# Altium PCB PCB2.PcbDoc (part 1 of 2)
Units mm, origin at the board's own origin, x right, y up, seen from the top; angles counter-clockwise.
Board outline 50.17 x 32.13 mm, 2 copper layers (Top Layer, Bottom Layer); 40 components, 154 nets, 422 pads, 221 vias.
Unrouted connection lines stored in the file: 21.
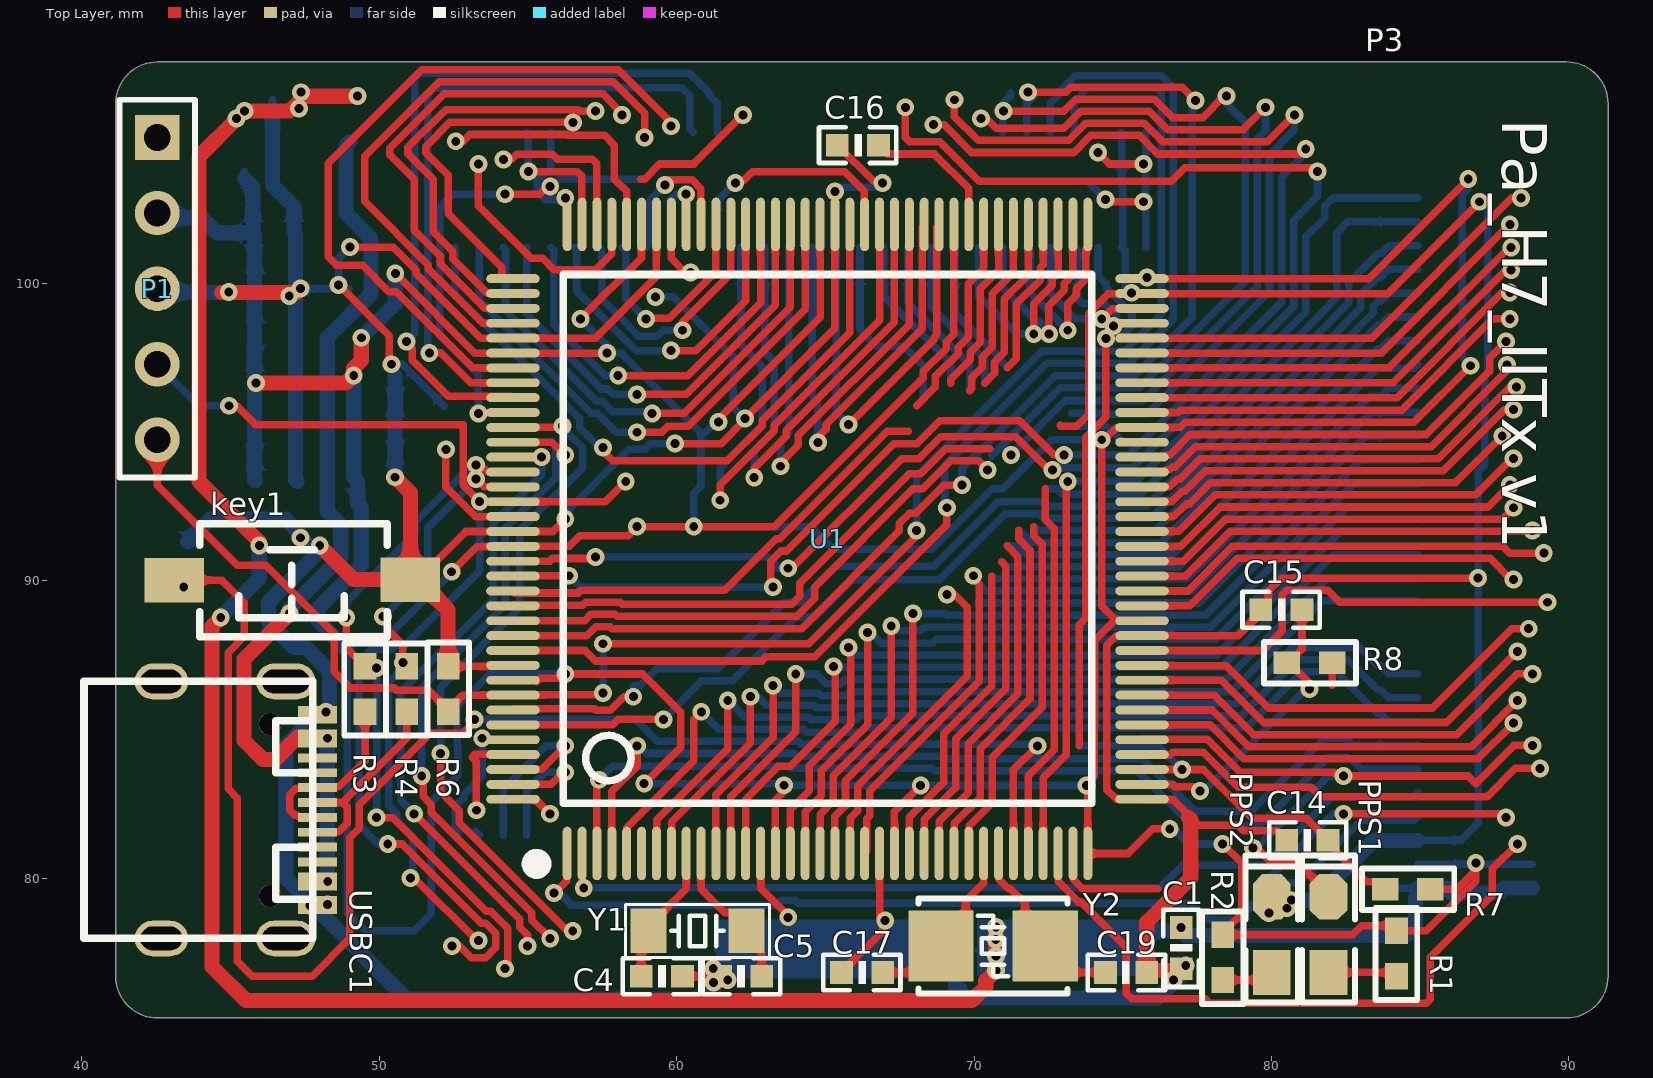
[diagram p0: Top Layer view]
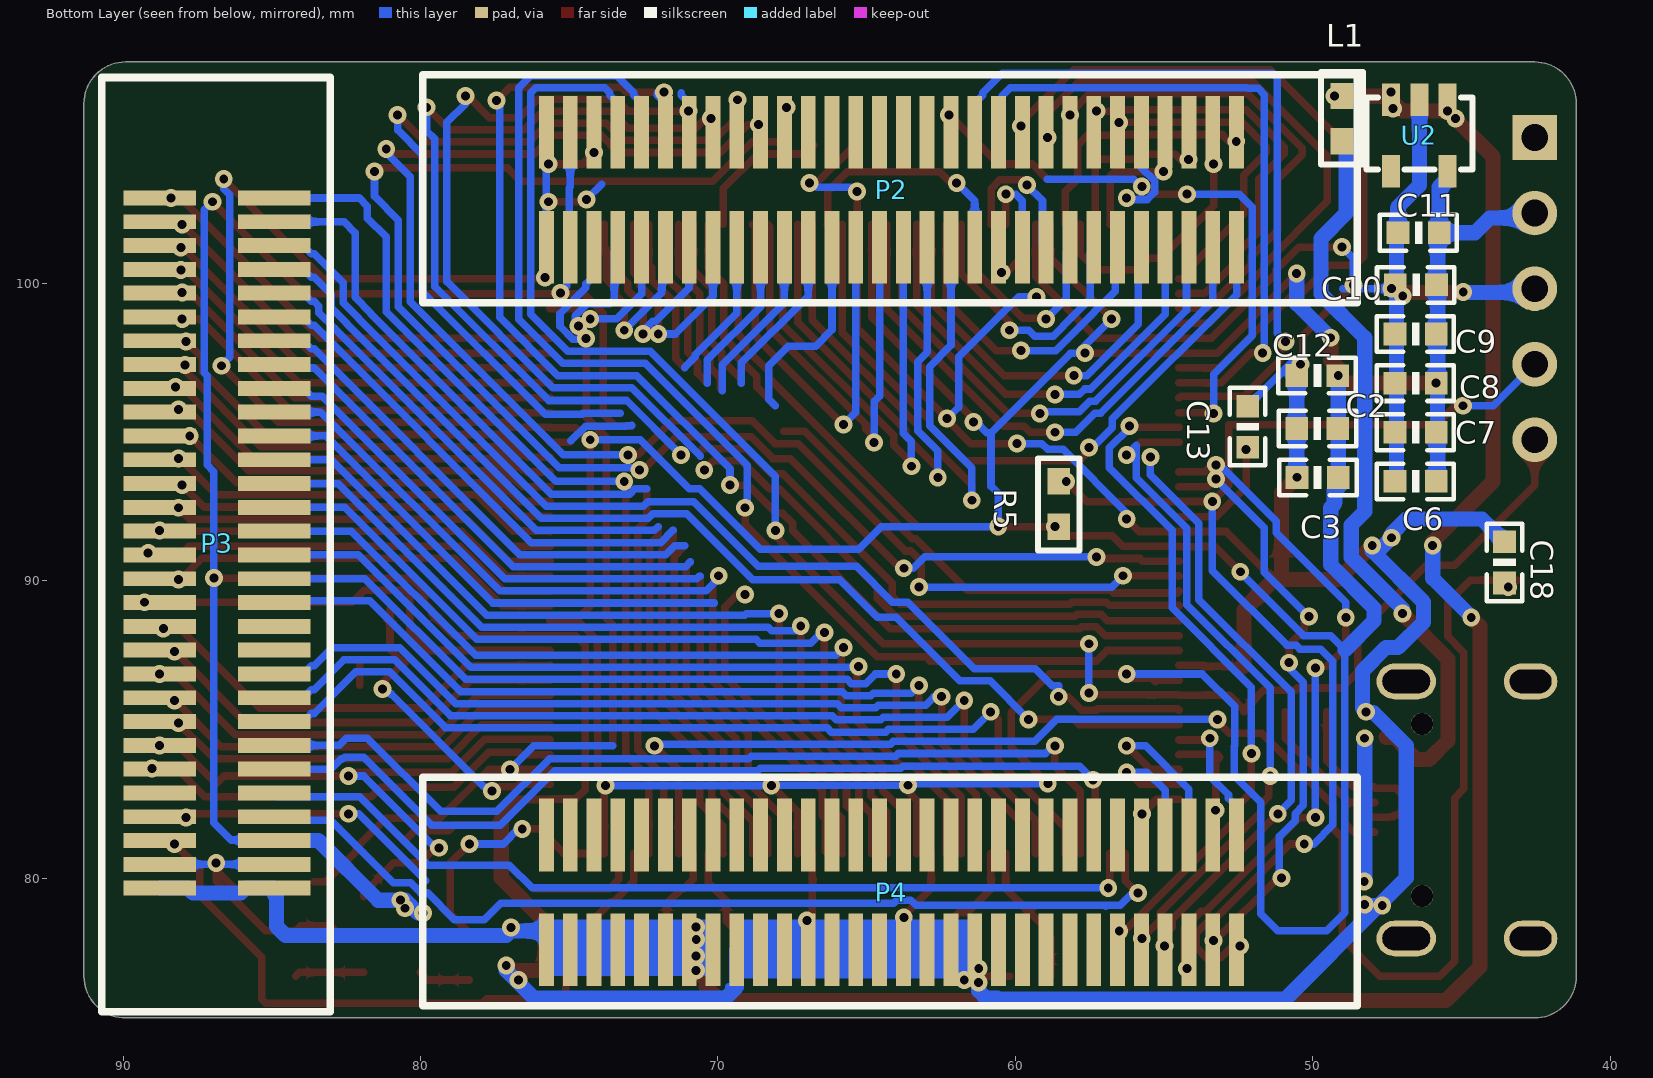
[diagram p1: Bottom Layer view, seen from below]

## Layer stack, top to bottom
Top Solder: solder mask 0.0102, Solder Resist, Dk 3.5
Top Layer: signal copper 0.0356
Dielectric 1: dielectric 0.32, FR-4, Dk 4.8
Bottom Layer: signal copper 0.0356
Bottom Solder: solder mask 0.0102, Solder Resist, Dk 3.5

## Board outline
42.545,75.311 cw(c42.545,76.708) 41.148,76.708 41.148,106.045 cw(c42.545,106.045) 42.545,107.442 43.561,107.442 42.926,107.442 89.916,107.442 cw(c89.916,106.045) 91.313,106.045 91.313,76.708 cw(c89.916,76.708) 89.916,75.311

## Design rules (kind name [scope] priority, off if disabled: settings)
Clearance [All] p1: gap=0.152 ignorepadtopadclearanceinfootprint=FALSE
ComponentClearance [All] p1 off: gap=0.254 collisioncheckmode=3 verticalgap=0.254 showdistances=FALSE
PolygonConnect [All] p1: connectstyle=Relief reliefconductorwidth=0.254 reliefentries=4 polygonreliefangle="90 Angle" airgapwidth=0.254
RoutingVias [All] p1: holewidth=0.711 width=1.27 viastyle="Through Hole" minholewidth=0.711 minwidth=1.27 maxholewidth=0.711 maxwidth=1.27
SolderMaskExpansion [All] p1: expansion=0.102 istentingtop=FALSE
Width [All] p1: maxlimit=1.524 minlimit=0.254 preferedwidth=0.254 minimp=50.000000 maximp=50.000000 favimp=50.000000
29 further rules are at their usual default settings.

## Components (designator, comment, footprint, x,y, rotation, side; value= is the part's Value field where it differs from the comment)
C1 "Cap Semi" 0603-C 76.964,78.346 r270 top value=105
C2 "Cap Semi" 0603-C 50.546,95.123 r180 bottom value=104
C3 "Cap Semi" 0603-C 50.533,93.474 r180 bottom value=105
C4 "" 0603-c 60.198,76.708 r180 top value=10P
C5 "" 0603-c 61.481,76.71 r0 top value=10P
C6 "" 0603-c 45.86,93.343 r0 bottom value=104
C7 "" 0603-c 45.86,94.994 r0 bottom value=104
C8 "" 0603-c 45.86,96.645 r0 bottom value=104
C9 "" 0603-c 45.86,98.296 r0 bottom value=104
C10 "" 0603-c 45.847,99.949 r0 bottom value=104
C11 "" 0603-c 45.758,101.7 r0 bottom value=106
C12 "" 0603-c 49.162,96.899 r0 bottom value=104
C13 "" 0603-c 52.197,94.488 r90 bottom value=2.2UF
C14 "" 0603-c 80.518,81.28 r0 top value=104
C15 "" 0603-c 81.026,89.027 r180 top value=104
C16 "" 0603-c 66.789,104.646 r180 top value=2.2UF
C17 "" 0603-c 66.929,76.835 r180 top value=20P
C18 "" 0603-c 43.561,91.313 r270 bottom value=104
C19 "" 0603-c 74.422,76.835 r0 top value=20P
key1 "KEY" "TSW SMD-3*6*2.5" 47.058,90.023 r180 top
L1 "L" 0603-r 49.022,106.299 r270 bottom
P1 "Header 5" HDR1X5 42.545,104.902 r270 top
P2 "Header 30X2" BTB60 64.174,103.124 r90 top locked
P3 "Header 30X2" BTB60 86.818,91.264 r0 top locked
P4 "Header 30X2" BTB60 64.174,79.502 r90 top locked
PPS1 "LED" "LED 0805G" 81.915,78.105 r90 top
PPS2 "LED" "LED 0805G" 80.01,78.105 r90 top
R1 "1k" 0603-R 84.201,76.708 r90 top
R2 "1k" 0603-r 78.359,76.581 r90 top
R3 "0Ω" 0603-r 49.53,85.598 r90 top
R4 "0Ω" 0603-r 50.927,85.598 r90 top
R5 "10K" 0603-r 58.547,91.821 r90 bottom
R6 "10K" 0603-r 52.324,87.122 r270 top
R7 "0" 0603-r 85.344,79.629 r180 top
R8 "0" 0603-r 82.042,87.249 r180 top
U1 "STM32H743IIT6" "LQFP144 20X20_N" 65.075,91.408 r0 top locked
U2 "RT9013" SOT23-5 46.421,104.972 r0 bottom
USBC1 "TYPE-C 3.1" TYPE-C-USB-17 45.307,82.298 r270 top
Y1 "32.768KHz" "OSC 3215-2P" 60.705,78.232 r180 top
Y2 "25M" "OSC 5032-2P" 70.64,77.724 r180 top

## Footprints (in the part's own frame and the unit in brackets; to place one, negate y for a bottom-side part, rotate by r counter-clockwise, add the part's x,y. Pads: shape width x height; smd on the part's side, far side on the other; paste and mask are expansions set on the pad)
0603-C [mil]
  rect 30x30 smd: 1(0,0) 2(54.5,-0.06)
  silkscreen extent -24,-24 79,24
0603-c [mil]
  rect 30x30 smd: 1(0,0) 2(54.5,-0.06)
  silkscreen extent -24,-24 79,24
0603-r [mil]
  rect 35x30 smd: 1(0,0) 2(60,0)
  silkscreen extent -31,-28 91,28, body extent -22,-19 82,19, height 39
0603-R [mil]
  rect 35x30 smd: 1(0,0) 2(60,0)
  silkscreen extent -31,-28 91,28, body extent -22,-19 82,19, height 39
BTB60 [mm]
  rect 2.44x0.5 smd far side: 1(-1.905,-11.594) 2(1.955,-11.594) 3(-1.905,-10.794) 4(1.955,-10.794) 5(-1.905,-9.994) 6(1.955,-9.994) 7(-1.905,-9.194) 8(1.955,-9.194) 9(-1.905,-8.394) 10(1.955,-8.394) 11(-1.905,-7.594) 12(1.955,-7.594) 13(-1.905,-6.794) 14(1.955,-6.794) 15(-1.905,-5.994) 16(1.955,-5.994) 17(-1.905,-5.194) 18(1.955,-5.194) 19(-1.905,-4.394) 20(1.955,-4.394) 21(-1.905,-3.594) 22(1.955,-3.594) 23(-1.905,-2.794) 24(1.955,-2.794) 25(-1.905,-1.994) 26(1.955,-1.994) 27(-1.905,-1.194) 28(1.955,-1.194) 29(-1.905,-0.394) 30(1.955,-0.394) 31(-1.905,0.406) 32(1.955,0.406) 33(-1.905,1.206) 34(1.955,1.206) 35(-1.905,2.006) 36(1.955,2.006) 37(-1.905,2.806) 38(1.955,2.806) 39(-1.905,3.606) 40(1.955,3.606) 41(-1.905,4.406) 42(1.955,4.406) 43(-1.905,5.206) 44(1.955,5.206) 45(-1.905,6.006) 46(1.955,6.006) 47(-1.905,6.806) 48(1.955,6.806) 49(-1.905,7.606) 50(1.955,7.606) 51(-1.905,8.406) 52(1.955,8.406) 53(-1.905,9.206) 54(1.955,9.206) 55(-1.905,10.006) 56(1.955,10.006) 57(-1.905,10.806) 58(1.955,10.806) 59(-1.905,11.606) 60(1.955,11.606)
HDR1X5 [mm] "Connector; Header; 5 Position"
  rect 1.5x1.5 hole 0.9: 1(0,0)
  round 1.5 hole 0.9: 2(2.54,0) 3(5.08,0) 4(7.62,0) 5(10.16,0)
  silkscreen extent -1.27,-1.27 11.43,1.27
"LED 0805G" [mil] "绿色0805LED"
  rect 60x50 smd: 1(-50,0)
  oct 60x50 smd: 2(50,0)
  silkscreen extent -90,-35 105,35, body extent -39,-25 39,25, height 32
"LQFP144 20X20_N" [mm] "144脚，体宽20x20mm，脚距0.5mm"
  oval 0.3x1.8 smd: 1(-8.75,-10.573) 2(-8.25,-10.573) 3(-7.75,-10.573) 4(-7.25,-10.573) 5(-6.75,-10.573) 6(-6.25,-10.573) 7(-5.75,-10.573) 8(-5.25,-10.573) 9(-4.75,-10.573) 10(-4.25,-10.573) 11(-3.75,-10.573) 12(-3.25,-10.573) 13(-2.75,-10.573) 14(-2.25,-10.573) 15(-1.75,-10.573) 16(-1.25,-10.573) 17(-0.75,-10.573) 18(-0.25,-10.573) 19(0.25,-10.573) 20(0.75,-10.573) 21(1.25,-10.573) 22(1.75,-10.573) 23(2.25,-10.573) 24(2.75,-10.573) 25(3.25,-10.573) 26(3.75,-10.573) 27(4.25,-10.573) 28(4.75,-10.573) 29(5.25,-10.573) 30(5.75,-10.573) 31(6.25,-10.573) 32(6.75,-10.573) 33(7.25,-10.573) 34(7.75,-10.573) 35(8.25,-10.573) 36(8.75,-10.573) 73(8.75,10.573) 74(8.25,10.573) 75(7.75,10.573) 76(7.25,10.573) 77(6.75,10.573) 78(6.25,10.573) 79(5.75,10.573) 80(5.25,10.573) 81(4.75,10.573) 82(4.25,10.573) 83(3.75,10.573) 84(3.25,10.573) 85(2.75,10.573) 86(2.25,10.573) 87(1.75,10.573) 88(1.25,10.573) 89(0.75,10.573) 90(0.25,10.573) 91(-0.25,10.573) 92(-0.75,10.573) 93(-1.25,10.573) 94(-1.75,10.573) 95(-2.25,10.573) 96(-2.75,10.573) 97(-3.25,10.573) 98(-3.75,10.573) 99(-4.25,10.573) 100(-4.75,10.573) 101(-5.25,10.573) 102(-5.75,10.573) 103(-6.25,10.573) 104(-6.75,10.573) 105(-7.25,10.573) 106(-7.75,10.573) 107(-8.25,10.573) 108(-8.75,10.573)
  oval 1.8x0.3 smd: 37(10.573,-8.75) 38(10.573,-8.25) 39(10.573,-7.75) 40(10.573,-7.25) 41(10.573,-6.75) 42(10.573,-6.25) 43(10.573,-5.75) 44(10.573,-5.25) 45(10.573,-4.75) 46(10.573,-4.25) 47(10.573,-3.75) 48(10.573,-3.25) 49(10.573,-2.75) 50(10.573,-2.25) 51(10.573,-1.75) 52(10.573,-1.25) 53(10.573,-0.75) 54(10.573,-0.25) 55(10.573,0.25) 56(10.573,0.75) 57(10.573,1.25) 58(10.573,1.75) 59(10.573,2.25) 60(10.573,2.75) 61(10.573,3.25) 62(10.573,3.75) 63(10.573,4.25) 64(10.573,4.75) 65(10.573,5.25) 66(10.573,5.75) 67(10.573,6.25) 68(10.573,6.75) 69(10.573,7.25) 70(10.573,7.75) 71(10.573,8.25) 72(10.573,8.75) 109(-10.573,8.75) 110(-10.573,8.25) 111(-10.573,7.75) 112(-10.573,7.25) 113(-10.573,6.75) 114(-10.573,6.25) 115(-10.573,5.75) 116(-10.573,5.25) 117(-10.573,4.75) 118(-10.573,4.25) 119(-10.573,3.75) 120(-10.573,3.25) 121(-10.573,2.75) 122(-10.573,2.25) 123(-10.573,1.75) 124(-10.573,1.25) 125(-10.573,0.75) 126(-10.573,0.25) 127(-10.573,-0.25) 128(-10.573,-0.75) 129(-10.573,-1.25) 130(-10.573,-1.75) 131(-10.573,-2.25) 132(-10.573,-2.75) 133(-10.573,-3.25) 134(-10.573,-3.75) 135(-10.573,-4.25) 136(-10.573,-4.75) 137(-10.573,-5.25) 138(-10.573,-5.75) 139(-10.573,-6.25) 140(-10.573,-6.75) 141(-10.573,-7.25) 142(-10.573,-7.75) 143(-10.573,-8.25) 144(-10.573,-8.75)
  silkscreen extent -10.03,-11.17 8.89,8.89, body extent -11,-11 11,11, height 1.45
"OSC 3215-2P" [mm] "3.2*1.5*0.6mm(长宽高)"
  rect 1.2x1.5 smd: 1(-1.65,0) 2(1.65,0)
  silkscreen extent -2.41,-0.89 2.41,0.89, body extent -1.6,-0.75 1.6,0.75, height 0.61
"OSC 5032-2P" [mm] "5mm*3.2mm*0.8mm(长*宽*高)"
  rect 2.2x2.4 smd: 1(-1.75,0) 2(1.75,0)
  silkscreen extent -2.5,-1.6 2.5,1.6, body extent -2.5,-1.6 2.5,1.6, height 0.86
SOT23-5 [mm]
  rect 0.6x1.1 smd: 1(-0.95,-1.2) 2(0,-1.2) 3(0.95,-1.2) 4(0.95,1.2) 5(-0.95,1.2)
  silkscreen extent -1.78,-1.27 1.78,1.14, body extent -1.55,-0.9 1.55,0.9, height 1.45
"TSW SMD-3*6*2.5" [mm] "3*6*2.5mm"
  rect 2x1.5 smd: 1(-3.996,-0.02) 2(3.937,0)
  silkscreen extent -3.21,-1.9 3.09,1.9, body extent -4,-1.88 4,1.62, height 2.59
TYPE-C-USB-17 [mm]
  oval 1.2x2 hole 0.8 slot 1.6 at 90 deg: 0(-4.32,1.556) 0(4.32,1.556)
  oval 1.2x1.8 hole 0.8 slot 1.4 at 90 deg: 0(-4.32,-2.624) 0(4.32,-2.624)
  rect 0.3x1.3 smd: A1(-3.35,2.623) A4(-2.55,2.623) A5(-1.25,2.623) A6(-0.25,2.623) A7(0.25,2.623) A8(-1.75,2.624) A9(2.55,2.623) A12(3.35,2.623) B1(3.05,2.623) B4(2.25,2.623) B5(1.75,2.623) B6(0.75,2.623) B7(-0.75,2.623) B8(1.25,2.624) B9(-2.25,2.623) B12(-3.05,2.623)
  round 0.75 hole 0.75 unplated: ""(-2.89,1.026) ""(2.89,1.026)
  silkscreen extent -4.32,-5.23 4.32,2.47

## Part data
C1 C2 C3: "Capacitor (Semiconductor SIM Model)", LatestRevisionDate=29-May-2009, LatestRevisionNote="IPC-7351 Footprint Added.", PackageDescription="Chip Capacitor", PackageReference=C1206, Published=8-Jun-2000, Publisher="Altium Limited"
C4 C5 C6 C7 C8 C9 C10 C11 C13 C14 C15 C16 C17 C18 C19: library part Cap_1_1, "Capacitor", LatestRevisionDate=17-Jul-2002, LatestRevisionNote="Re-released for DXP Platform.", PackageDescription="Radial Cap, Thru-Hole; 2 Leads; 0.3 in Pin Spacing", PackageReference=RAD-0.3, Published=8-Jun-2000, Publisher="Altium Limited"
C12: library part Cap_1_1, "104", LatestRevisionDate=17-Jul-2002, LatestRevisionNote="Re-released for DXP Platform.", PackageDescription="Radial Cap, Thru-Hole; 2 Leads; 0.3 in Pin Spacing", PackageReference=RAD-0.3, Published=8-Jun-2000, Publisher="Altium Limited"
P1: "Header, 5-Pin"
P2 P3 P4: "Header, 30-Pin, Dual row", LatestRevisionDate=17-Jul-2002, LatestRevisionNote="Re-released for DXP Platform.", Publisher="Altium Limited"
R1 R2 R3 R4 R5 R6 R7 R8: library part RES, "Resistor", LatestRevisionDate=17-Jul-2002, LatestRevisionNote="Re-released for DXP Platform.", PackageDescription="Axial Device, Thru-Hole; 2 Leads; 0.4 in Pin Spacing", PackageReference=AXIAL-0.4, Published=8-Jun-2000, Publisher="Altium Limited"
U1: BOM_LCSC Assembly=Yes, BOM_Manufacturer=STMicroelectronics, BOM_Manufacturer Part=STM32H743IIT6, BOM_Supplier=LCSC, BOM_Supplier Part=C89597, Contributor=LCSC, SMT Type=Extend, spicePre=U, spiceSymbolName=STM32H743IIT6
Y1 Y2: library part XTAL, "Crystal Oscillator", LatestRevisionDate=17-Jul-2002, LatestRevisionNote="Re-released for DXP Platform.", Published=8-Jun-2000, Publisher="Altium Limited"

## Via types
v1: diameter 0.6, hole 0.3, Top Layer to Bottom Layer, 221 vias

## Nets (pads, with @x,y where several pads share a name; then routed paths per layer and width w, separated by ;. In a path a pad name is that pad's centre, name@x,y a point inside that pad or via, vN(x,y) a via of type N, cw(c..) or ccw(c..) an arc to the next point about the centre after c; other vN are vias at no path point)
3.3V: C2.2 C3.2 C6.1 C7.1 C8.1 C9.1 C10.1 C11.1 C12.1 P1.2 P2.1 P2.2 P2.6 P3.3 P3.4 R1.2 R2.2 R5.1 R7.1 U1.15 U1.23 U1.36 U1.49 U1.62 U1.72 U1.82 U1.91 U1.103 U1.114 U1.127 U1.136 U2.5 | length 237.9
  Top Layer w0.254: v1@50.676,100.206 53.224,97.658 U1.114@54.502,97.658 54.51,97.65 57.645,97.65 v1(57.658,97.663) ; v1(52.441,90.307) 53.284,91.149 54.493,91.149 U1.127@54.502,91.158 56.388,91.158 56.749,91.519 58.372,91.519 v1(58.674,91.821) v1(60.579,91.821) 63.289,91.821 68.297,96.829 68.297,97.042 69.063,97.807 69.063,98.021 69.325,98.284 U1.82@69.325,101.981 ; U1.136@54.502,86.658 55.264,86.658 55.308,86.614 55.423,86.729 56.122,86.729 v1(56.261,86.868) 58.858,86.868 60.142,85.584 60.142,84.413 v1(58.913,83.184) ; v1(56.769,98.806) 58.825,100.862 U1.103@58.825,101.981 ; v1(61.411,95.344) 61.411,95.447 64.825,98.861 U1.91@64.825,101.981 ; U1.15@63.325,80.835 63.325,82.629 63.609,82.913 v1(63.609,83.129) ; U1.23@67.325,80.835 67.325,82.238 v1(68.208,83.121) v1@68.244,83.121 ; v1@73.797,83.195 74.041,83.439 74.041,85.09 74.062,85.111 74.062,88.004 74.066,88.008 74.066,88.011 74.705,88.649 ; v1@73.825,83.133 U1.36@73.825,80.835 75.18,80.835 76.006,81.661 v1(76.581,81.661) ; v1(74.168,104.394) 74.549,104.013 v1(75.692,104.013) ; v1(74.295,94.742) 74.295,89.154 74.782,88.667 75.639,88.667 U1.49@75.648,88.658 ; v1(74.422,102.819) 74.498,102.743 v1(75.692,102.743) ; v1@74.469,94.836 74.782,95.149 75.639,95.149 U1.62@75.648,95.158 76.931,95.158 77.099,95.326 84.785,95.326 v1(86.69,97.231) ; U1.72@75.648,100.158 83.267,100.158 v1(86.614,103.505) ; v1(78.359,81.153) 78.994,80.518 78.994,78.803 78.359,78.168 R2.2@78.359,78.105 82.724,78.105 83.03,78.412 84.021,78.412 R1.2@84.201,78.232 85.206,78.232 86.868,79.894 v1@86.868,80.264 ; R7.1@85.344,79.629 86.233,79.629 v1@86.868,80.264 ; v1(86.868,80.518) v1@86.868,80.264
  Top Layer w0.508: v1(45.86,96.645) 48.893,96.645 v1(49.149,96.901) 49.149,97.155 49.403,97.409 v1(49.403,98.171)
  Bottom Layer w0.254: P1.2@42.164,102.235 P1.2@42.264,102.335 ; U2.5@45.471,103.522 U2.5@45.471,103.772 ; C6.1@45.847,93.356 C6.1@45.86,93.343 ; v1(52.441,90.307) 52.441,90.284 50.392,88.235 50.317,88.16 49.407,88.16 48.925,87.678 48.925,78.837 49.53,78.232 51.181,78.232 51.76,78.811 51.76,82.564 52.649,83.453 52.649,84.441 52.634,84.457 52.634,85.781 53.721,86.868 v1(56.261,86.868) ; v1(56.769,98.806) v1@57.923,97.652 ; 58.034,97.658 58.15,97.658 60.822,94.985 ; v1(58.913,83.184) 63.554,83.184 v1(63.609,83.129) 68.199,83.129 v1(68.208,83.121) v1(73.787,83.121) ; v1(61.411,95.344) 61.317,95.344 60.958,94.985 60.822,94.985 ; 73.908,103.333 v1(74.422,102.819) ; v1(74.295,94.742) 72.62,94.742 70.969,93.091 70.612,93.091 68.583,91.062 65.275,91.062 64.516,91.821 v1(60.579,91.821) 60.579,92.943 60.822,93.186 60.822,94.985 ; v1(75.692,102.743) 75.768,102.667 P2.1@75.768,101.219 ; v1@75.768,102.819 P2.2@75.768,105.079 ; v1(76.581,81.661) 76.708,81.661 77.216,81.153 v1(78.359,81.153) ; P3.3@84.913,80.47 P3.4@88.773,80.47 ; v1(86.614,103.505) 86.614,103.181 86.416,102.983 86.416,97.52 86.69,97.245 v1(86.69,97.231)
  Bottom Layer w0.508: P1.2@42.545,102.362 42.711,102.196 44.057,102.196 44.553,101.7 C11.1@45.758,101.7 ; U2.5@45.471,103.522 45.758,103.235 C11.1@45.758,101.7 ; C6.1@45.847,93.356 45.809,93.394 45.809,101.649 C11.1@45.758,101.7 ; 48.925,87.678 47.943,88.66 47.943,89.081 49.403,90.54 49.403,92.456 49.276,92.583 49.276,93.345 C3.2@49.149,93.472 v1(49.149,96.901) ; v1(49.403,98.171) 50.546,99.314 v1(50.546,100.33)
  other v1: 75.819,100.203
5V: C1.1 L1.1 P3.1 P3.2 P4.1 P4.3 P4.5 P4.7 P4.9 P4.11 P4.13 P4.15 U2.1 U2.3 | length 85.5
  Top Layer w0.508: v1(44.679,88.773) 44.39,88.484 44.39,77.022 45.524,75.888 69.929,75.888 70.396,76.356 70.396,76.556 v1(70.739,76.898) v1(70.739,76.898) v1(70.74,77.391) 70.73,77.401 v1(70.73,77.94) 70.73,78.35 v1(70.739,78.359) ; v1(45.974,91.186) 45.974,91.313 43.942,93.345 43.942,104.262 45.215,105.535 v1(45.471,105.791) 46.995,105.791 47.186,105.981 v1@47.376,106.172 ; v1(47.376,106.426) 47.513,106.289 v1@49.266,106.289
  Bottom Layer w0.254: P4.15@70.168,77.597 70.739,77.597 P4.13@70.968,77.597 P4.11@71.768,77.597 P4.9@72.568,77.597 P4.7@73.368,77.597 P4.5@74.168,77.597 P4.3@74.968,77.597 P4.1@75.768,77.597 ; P3.1@83.943,79.67 P3.1@84.913,79.67
  Bottom Layer w0.508: v1(44.679,88.773) 44.679,88.793 45.974,90.088 v1(45.974,91.186) ; P4.1@75.768,77.597 75.768,78.228 75.772,78.232 76.964,78.232 77.116,78.08 84.538,78.08 84.836,78.377 84.836,79.372 84.909,79.445 84.909,79.666 P3.1@84.913,79.67 85.875,79.67 86.043,79.502 87.643,79.502 87.811,79.67 P3.2@88.773,79.67
  other v1: 76.964,78.346 45.202,105.547 47.309,105.883 49.276,106.299
BOOT0: P1.1
C0: P3.57 U1.32 | length 30.4
  Top Layer w0.254: U1.32@71.825,80.835 71.825,83.449 72.695,84.319 72.695,91.746 72.39,92.051 72.39,93.091
  Bottom Layer w0.254: 72.39,93.091 72.795,93.091 72.973,92.913 75.6,92.913 81.667,98.979 81.667,98.999 82.194,99.527 82.194,101.693 82.572,102.07 P3.57@84.913,102.07
C1: P3.59 U1.33 | length 30.3
  Top Layer w0.254: U1.33@72.325,80.835 72.325,83.374 73.101,84.15 73.101,93.294 v1(73.152,93.345)
  Bottom Layer w0.254: v1(73.152,93.345) 75.457,93.345 81.153,99.041 81.153,101.561 81.788,102.196 81.788,102.594 82.064,102.87 P3.59@84.913,102.87
C2: P3.6 U1.34 | length 22.5
  Top Layer w0.254: U1.34@72.825,80.835 72.834,80.826 72.834,79.894 73.525,79.203 73.606,79.203 75.121,77.689 75.121,76.136 75.311,75.946 77.773,75.946 77.926,75.794 85.195,75.794 85.344,75.942 85.344,77.343 87.427,79.426 87.427,80.315 v1(88.265,81.153)
C3: P3.8 U1.35 | length 12.9
  Top Layer w0.254: U1.35@73.325,80.835 73.334,80.826 73.334,79.969 73.647,79.656 76.182,79.656 ; v1(82.423,82.169) 87.757,82.169 v1(87.884,82.042)
  Bottom Layer w0.254: 79.829,79.913 82.085,82.169 v1(82.423,82.169)
GND: C1.2 C2.1 C3.1 C4.1 C5.1 C6.2 C7.2 C8.2 C9.2 C10.2 C11.2 C12.2 C13.2 C14.1 C15.2 C16.2 C17.2 C18.1 C19.2 key1.1 P1.3 P2.3 P2.4 P3.5 P4.17 P4.19 P4.21 P4.23 P4.25 P4.27 P4.29 P4.31 P4.33 P4.35 P4.37 PPS2.2 R6.1 U1.14 U1.22 U1.37 U1.48 U1.61 U1.71 U1.90 U1.102 U1.113 U1.126 U1.135 U2.2 USBC1.A1 USBC1.A12 USBC1.B1 USBC1.B12 | length 247.9
  Top Layer w0.254: v1(48.641,99.949) 50.348,98.242 50.348,97.353 v1(50.419,97.282) ; v1(49.022,101.219) 50.476,101.219 51.252,100.443 51.252,100.319 53.413,98.158 U1.113@54.502,98.158 57.264,98.158 59.325,100.219 U1.102@59.325,101.981 ; key1.1@51.304,90.043 52.919,91.658 U1.126@54.502,91.658 55.844,91.658 v1(56.261,92.075) ; R6.1@52.324,87.122 53.704,87.122 53.74,87.158 U1.135@54.502,87.158 ; v1(59.944,94.615) 61.501,94.615 62.297,95.411 v1(62.297,95.455) 65.325,98.483 U1.90@65.325,101.981 v1(65.325,103.083) ; C4.1@60.198,76.708 61.479,76.708 61.266,76.495 v1(61.243,76.495) ; U1.14@62.825,80.835 62.834,80.826 62.834,79.66 63.754,78.74 v1(63.754,78.689) ; C16.2@65.405,104.648 66.609,103.444 ; C17.2@65.545,76.837 66.929,78.221 66.929,78.613 66.825,78.717 U1.22@66.825,80.835 ; 72.898,95.225 72.923,95.199 73.458,95.199 73.85,95.592 73.85,98.996 74.512,99.658 U1.71@75.648,99.658 83.91,99.658 v1(86.995,102.743) ; U1.61@74.946,94.702 74.946,94.69 74.977,94.658 U1.61@75.648,94.658 ; 77.216,81.788 77.553,81.788 ; C15.2@79.629,88.9 78.887,88.158 U1.48@75.648,88.158 75.639,88.149 74.782,88.149 74.469,87.836 74.469,82.98 74.782,82.667 75.639,82.667 75.657,82.649 76.692,82.649 77.257,82.083 77.553,81.788 ; C15.2@79.642,89.029 79.896,89.283 79.896,89.642 80.347,90.094 v1(86.944,90.094) ; C14.1@80.518,81.28 80.192,81.606 79.049,81.606 78.867,81.788 77.553,81.788
  Top Layer w0.508: v1@44.704,99.695 v1@47.244,99.695 ; v1(48.006,91.186) 49.149,90.043 key1.1@51.054,90.043 ; v1@50.546,93.472 51.054,92.964 key1.1@51.054,90.043 ; R6.1@52.324,87.122 52.324,89.023 51.304,90.043 key1.1@51.054,90.043 ; C1.2@76.962,76.962 76.898,76.898 75.871,76.898 C19.2@75.806,76.833 75.806,78.526 77.287,80.007 77.287,81.971 77.216,82.042
  Bottom Layer w0.254: U2.2@46.421,105.791 U2.2@46.421,106.172 ; v1(47.361,99.832) 47.371,99.822 48.991,99.822 ; v1(48.641,99.949) 48.641,100.838 v1(49.022,101.219) ; v1(50.419,97.282) 50.435,97.298 50.77,97.298 C13.2@52.195,95.872 ; v1(56.261,92.075) 56.261,92.28 58.398,94.417 58.914,94.417 59.112,94.615 v1(59.944,94.615) ; v1(59.294,99.547) 59.896,99.547 61.909,97.534 61.909,95.844 v1(62.297,95.455) ; P4.37@61.368,77.597 P4.35@62.168,77.597 P4.33@62.968,77.597 P4.31@63.768,77.597 P4.29@64.568,77.597 P4.27@65.368,77.597 P4.25@66.168,77.597 P4.23@66.968,77.597 P4.21@67.768,77.597 P4.19@68.568,77.597 P4.17@69.368,77.597 ; v1@65.562,103.227 66.684,103.227 66.835,103.378 v1(66.929,103.378) ; 69.639,76.356 69.639,76.261 69.827,76.073 71.386,76.073 ; 72.898,95.225 72.908,95.215 73.084,95.215 73.1,95.199 74.448,95.199 74.946,94.702 ; P2.4@74.968,105.079 74.968,103.251 75.001,103.218 75.001,101.252 P2.3@74.968,101.219 75.091,101.096 75.091,99.904 75.299,99.697 v1(75.299,99.683) ; P3.5@84.913,81.27 84.928,81.285 86.365,81.285 86.944,81.864 v1(86.944,90.094) 86.944,93.67 87.17,93.895 87.17,96.891 87.27,96.991 87.27,102.468 v1(86.995,102.743)
  Bottom Layer w0.508: P1.3@42.545,99.822 42.672,99.695 v1@44.704,99.695 ; C18.1@43.561,91.313 44.323,92.075 46.863,92.075 47.361,91.577 v1(47.361,91.45) v1@47.863,90.948 ; U2.2@46.421,105.791 46.421,103.297 47.142,102.576 C11.2@47.142,101.702 47.193,101.651 47.193,93.396 C6.2@47.244,93.345 ; v1(48.006,91.186) 48.006,91.011 46.284,89.289 46.284,88.607 47.137,87.754 47.551,87.754 48.336,86.969 48.336,85.717 v1(48.216,85.598) 48.199,85.58 47.973,85.58 46.863,84.47 46.863,80.01 47.669,79.204 v1(47.669,79.08) v1@47.793,79.08 ; v1(48.26,79.121) 48.219,79.08 v1@47.793,79.08 ; C3.1@50.54,93.48 C12.2@50.54,96.895 ; 66.421,77.089 64.568,77.089 61.803,77.089 61.236,76.522 61.236,76.22 60.986,75.971 60.604,75.971 60.579,75.946 50.927,75.946 v1@47.793,79.08 ; P4.17@69.368,77.597 69.372,77.593 69.372,76.348 69.75,75.971 76.186,75.971 77.119,76.903 v1(77.119,77.067) ; v1(79.913,78.835) 80.08,78.835 80.509,79.265 v1(80.671,79.265) 81.424,79.265 83.425,81.266 84.909,81.266 P3.5@84.913,81.27
  other v1: 61.722,76.581 76.708,76.581 61.234,76.97 67.014,78.585 80.518,78.994 50.536,93.482 46.98,99.578 44.948,99.705
NetC13_1: C13.1 U1.125 | length 3.9
  Top Layer w0.254: v1(52.248,94.413) 52.248,93.167 53.257,92.158 U1.125@54.502,92.158
NetC16_1: C16.1 U1.81 | length 4.9
  Top Layer w0.254: C16.1@66.789,104.646 67.087,104.349 68.668,104.349 69.821,103.196 69.821,102.798 69.816,102.793 69.816,101.99 U1.81@69.825,101.981
NetL1_2: L1.2 USBC1.A4 USBC1.A9 USBC1.B4 USBC1.B9 | length 30.2
  Top Layer w0.508: v1(46.99,88.9) 45.457,87.367 45.457,86.004 45.466,85.994 45.466,84.626 46.103,83.989 46.524,83.989 46.875,84.34 46.875,84.366 47.252,84.744 USBC1.A4@47.534,84.744
  Bottom Layer w0.508: v1(46.99,88.9) 46.99,89.061 48.712,90.784 48.712,91.877 48.26,92.329 48.26,98.171 49.728,99.639 49.728,101.512 48.895,102.345 48.895,104.648 L1.2@49.022,104.775 ; v1(48.26,84.709) 48.26,79.911 v1(48.274,79.897)
NetPPS1_1: PPS1.1 R1.1 | length 2.3
  Top Layer w0.254: PPS1.1@81.915,76.835 84.074,76.835 R1.1@84.201,76.708
NetPPS2_1: PPS2.1 R2.1 | length 1.8
  Top Layer w0.254: R2.1@78.359,76.581 79.756,76.581 PPS2.1@80.01,76.835
NetR3_1: R3.1 USBC1.A7 USBC1.B7 | length 6.2
  Top Layer w0.254: USBC1.A7@47.93,82.048 47.43,82.048 47.407,82.071 47.306,82.071 47.259,82.119 47.165,82.119 47.042,82.241 47.001,82.282 47.001,82.814 47.212,83.025 47.907,83.025 47.953,83.071 48.649,83.071 49.53,83.953 R3.1@49.53,85.598
NetR4_1: R4.1 USBC1.A6 USBC1.B6 | length 6.7
  Top Layer w0.254: USBC1.B6@47.93,81.548 47.953,81.571 48.648,81.571 48.925,81.848 48.925,82.389 48.766,82.548 ; USBC1.A6@47.93,82.548 48.766,82.548 ; R4.1@50.927,85.598 50.927,84.709 48.766,82.548
OSC_IN: C17.1 U1.29 Y2.2 | length 6
  Top Layer w0.254: C17.1@66.929,76.835 68.001,76.835 69.723,78.557 69.723,79.248 70.321,79.846 70.321,80.831 U1.29@70.325,80.835
OSC_OUT: C19.1 U1.30 Y2.1 | length 6.2
  Top Layer w0.254: U1.30@70.825,80.835 70.834,80.826 70.834,79.969 71.147,79.656 71.22,79.656 71.72,79.156 71.72,78.394 73.279,76.835 C19.1@74.422,76.835
PA0: P3.12 U1.40 | length 14.4
  Top Layer w0.254: U1.40@75.648,84.158 75.657,84.149 76.599,84.149 76.69,84.24 76.831,84.24 77.703,84.24 78.876,83.067 81.342,83.067 81.661,82.748 87.254,82.748 88.198,83.693 v1(89.027,83.693)
PA1: P3.14 PPS1.2 U1.41 | length 21.6
  Top Layer w0.254: U1.41@75.648,84.658 75.669,84.679 77.839,84.679 78.952,83.566 82.101,83.566 82.162,83.505 82.357,83.505 v1(82.423,83.439) 86.614,83.439 86.868,83.185 88.153,84.47 v1(88.773,84.47) ; v1(79.375,81.026) 79.502,81.026 80.01,80.518 80.899,80.518 81.915,79.502 PPS1.2@81.915,79.375
  Bottom Layer w0.254: v1(79.375,81.026) 79.502,81.026 81.915,83.439 v1(82.423,83.439)
PA2: P3.16 U1.42 | length 13.5
  Top Layer w0.254: U1.42@75.648,85.158 77.935,85.158 79.074,84.018 86.939,84.018 v1(88.138,85.217)
PA3: P3.26 U1.47 | length 15.4
  Top Layer w0.254: U1.47@75.648,87.658 79.706,87.658 80.367,88.319 80.367,88.529 80.366,88.53 80.366,89.537 80.516,89.687 81.89,89.687 82.296,89.281 v1(89.281,89.281)
PA4: P3.28 U1.50 | length 13.4
  Top Layer w0.254: U1.50@75.648,89.158 77.253,89.158 78.849,90.754 87.347,90.754 88.059,90.043 v1(88.138,90.043)
PA5: P3.30 U1.51 | length 14.2
  Top Layer w0.254: U1.51@75.648,89.658 77.178,89.658 78.68,91.161 87.782,91.161 88.011,90.932 v1(89.154,90.932)
PA6: P3.32 U1.52 | length 13.8
  Top Layer w0.254: U1.52@75.648,90.158 77.103,90.158 78.614,91.669 88.748,91.669 v1(88.773,91.694)
PA7: P3.34 U1.53 | length 13.2
  Top Layer w0.254: U1.53@75.648,90.658 77.028,90.658 78.445,92.075 87.757,92.075 v1(88.138,92.456)
PA8: P4.49 U1.119 | length 22.9
  Top Layer w0.254: v1(52.07,84.201) 52.07,82.888 52.691,82.267 52.691,81.872 56.331,78.232 v1(56.511,78.232) ; U1.119@54.502,95.158 56.11,95.158 v1(56.161,95.209)
  Bottom Layer w0.254: v1(52.07,84.201) 52.07,86.424 54.737,89.091 54.737,91.694 56.84,93.797 56.84,94.474 56.161,95.153 v1(56.161,95.209)
PA9: P4.51 U1.120 | length 22.6
  Top Layer w0.254: v1(51.435,83.439) 51.481,83.393 51.481,82.758 51.76,82.479 51.76,82.227 55.139,78.849 55.139,78.592 v1(55.753,77.978) ; U1.120@54.502,94.658 55.797,94.658 56.221,94.234 v1(56.261,94.234)
  Bottom Layer w0.254: v1(51.435,83.439) 51.435,86.399 54.238,89.203 54.238,91.77 55.942,93.474 55.942,94.553 v1(56.261,94.234)
PA10: P4.53 U1.121 | length 20.2
  Top Layer w0.254: v1(51.181,82.169) 54.732,78.618 54.732,78.35 54.991,78.091 v1(54.991,77.724)
  Bottom Layer w0.254: v1(51.181,82.169) 50.729,82.621 50.729,86.268 53.832,89.371 53.832,91.938 55.462,93.569 v1(55.462,94.158)
PA11/USB_DM: P4.55 R3.2 U1.122 | length 22.6
  Top Layer w0.254: v1(48.895,88.773) 48.895,87.757 R3.2@49.53,87.122 ; v1(49.911,82.042) 50.465,82.042 53.607,78.9 53.748,78.9 54.326,78.323 54.326,77.059 v1(54.229,76.962) ; v1(53.264,93.901) 53.274,93.891 53.412,93.891 53.636,93.667 54.493,93.667 U1.122@54.502,93.658
  Bottom Layer w0.254: v1(48.895,88.773) 48.895,89.278 51.227,91.61 51.227,91.995 53.123,93.891 53.254,93.891 v1(53.264,93.901) ; v1(49.911,82.042) 49.916,82.047 v1(49.916,87.066)
PA12/USB_DP: P4.57 R4.2 U1.123 | length 20.1
  Top Layer w0.254: v1@50.215,88.659 50.204,88.648 50.204,88.64 50.291,88.554 50.291,88.363 50.8,87.853 50.8,87.197 50.837,87.16 50.901,87.096 R4.2@50.927,87.122 ; v1(51.054,80.01) 51.181,80.01 53.276,77.915 v1(53.34,77.915) ; v1(53.264,93.421) 53.278,93.421 53.532,93.167 54.493,93.167 U1.123@54.502,93.158
  Bottom Layer w0.254: v1(50.138,88.8) 51.633,90.296 51.633,91.791 v1(53.264,93.421) ; v1(50.8,87.249) 50.8,87.065 50.322,86.587 50.322,82.453 50.602,82.174 50.602,81.929 51.125,81.405 51.125,80.081 v1(51.054,80.01)
"PA13 SWDIO": P1.4 P4.59 R5.2 U1.124 | length 40.4
  Top Layer w0.254: v1@45.212,95.885 45.847,95.25 52.832,95.25 52.832,93.218 v1(53.383,92.667) 54.493,92.667 U1.124@54.502,92.658 57.606,92.658 v1(58.293,93.345) ; v1(50.292,81.153) 50.779,81.153 53.439,78.494 53.58,78.494 53.919,78.154 53.919,77.675 53.58,77.335 53.094,77.335 52.705,77.724 v1(52.451,77.724)
  Bottom Layer w0.254: P1.4@42.545,97.282 43.942,95.885 v1(44.958,95.885) ; v1(50.292,81.153) 49.981,81.153 49.332,81.802 49.332,87.301 49.734,87.703 50.435,87.703 50.56,87.828 50.871,87.828 53.383,90.34 v1(53.383,92.667)
"PA14 SWCLK": P1.5 P2.8 R6.2 U1.137 | length 58.6
  Top Layer w0.254: P1.5@42.545,94.742 42.545,93.218 45.237,90.526 46.184,90.526 48.489,88.221 48.489,86.943 49.033,86.398 50.508,86.398 50.584,86.322 51.664,86.322 R6.2@52.324,85.661 ; R6.2@52.324,85.598 R6.2@52.324,85.661 ; v1(57.531,86.233) 57.465,86.167 54.511,86.167 U1.137@54.502,86.158 52.821,86.158 R6.2@52.324,85.661 ; v1(57.531,87.884) 64.438,87.884 68.072,91.518 v1(68.072,91.694)
  Bottom Layer w0.254: v1(57.531,86.233) v1(57.531,87.884) ; v1(68.072,91.694) 68.072,93.51 72.275,97.714 75.048,97.714 76.297,98.964 76.297,106.415 76.134,106.578 73.802,106.578 73.639,106.415 73.639,106.32 73.368,106.049 P2.8@73.368,105.079
PA15: P3.55 U1.138 | length 37.7
  Top Layer w0.254: U1.138@54.502,85.658 54.54,85.696 57.248,85.696 57.291,85.654 57.771,85.654 58.223,86.106 v1(58.547,86.106)
  Bottom Layer w0.254: v1(58.547,86.106) 58.547,86.468 58.764,86.468 59.336,87.041 61.387,87.041 63.627,89.281 64.135,89.281 65.341,90.487 68.644,90.487 70.815,92.659 72.356,92.659 72.509,92.507 75.769,92.507 82.073,98.811 82.073,98.819 82.601,99.347 82.601,100.023 83.577,100.999 83.672,100.999 83.943,101.27 P3.55@84.913,101.27
PB0: P3.40 U1.56 | length 13.2
  Top Layer w0.254: U1.56@75.648,92.158 75.657,92.167 76.72,92.167 77.063,92.509 77.081,92.509 77.154,92.583 77.229,92.583 77.94,93.294 86.182,93.294 v1(87.757,94.869)
PB1: P3.42 U1.57 | length 13.8
  Top Layer w0.254: U1.57@75.648,92.658 75.657,92.667 76.645,92.667 76.894,92.916 76.913,92.916 77.006,93.009 77.081,93.009 77.772,93.701 85.769,93.701 87.827,95.758 v1(88.138,95.758)
PB2: P3.44 U1.58 | length 14
  Top Layer w0.254: U1.58@75.648,93.158 75.657,93.167 76.571,93.167 76.726,93.322 76.744,93.322 76.838,93.416 76.913,93.416 77.604,94.107 85.598,94.107 88.001,96.51 v1(88.234,96.51)
PB3: P4.26
PB4: P4.24
PB5: P4.22
PB6: P4.20
PB7: P4.18
PB8: P4.16
PB9: P4.14
PB10: P2.23 U1.79 | length 11.5
  Top Layer w0.254: 69.215,96.647 69.215,96.774 69.875,97.434 69.875,97.685 70.206,98.015 70.206,99.816 70.825,100.435 U1.79@70.825,101.981
  Bottom Layer w0.254: P2.23@66.968,101.219 66.968,99.571 69.215,97.324 69.215,96.647
PB11: P2.25 U1.80 | length 13.9
  Top Layer w0.254: 68.072,95.885 68.704,96.517 68.704,96.873 69.469,97.639 69.469,97.853 69.799,98.183 69.799,99.984 70.325,100.51 U1.80@70.325,101.981
  Bottom Layer w0.254: P2.25@66.168,101.219 66.168,98.443 66.72,97.892 67.632,97.892 68.297,97.227 68.297,96.11 68.072,95.885
PB12: P2.57 U1.92 | length 19.2
  Top Layer w0.254: v1(58.674,94.996) 59.506,94.996 59.704,95.194 60.396,95.194 64.325,99.123 U1.92@64.325,101.981
  Bottom Layer w0.254: P2.57@53.368,101.219 53.368,99.409 57.142,95.636 57.335,95.636 57.975,94.996 v1(58.674,94.996)